# Altium PCB 2014_BALISE_CARTE_EMETTEUR.PCBDOC
Units mil, origin at the board's own origin, x right, y up, seen from the top; angles counter-clockwise.
Board outline 2362.2 x 2362.2 mil, 4 copper layers (1-TOP, 2-Signal, 3-GND, 4-BOT); 73 components, 81 nets, 316 pads, 119 vias.
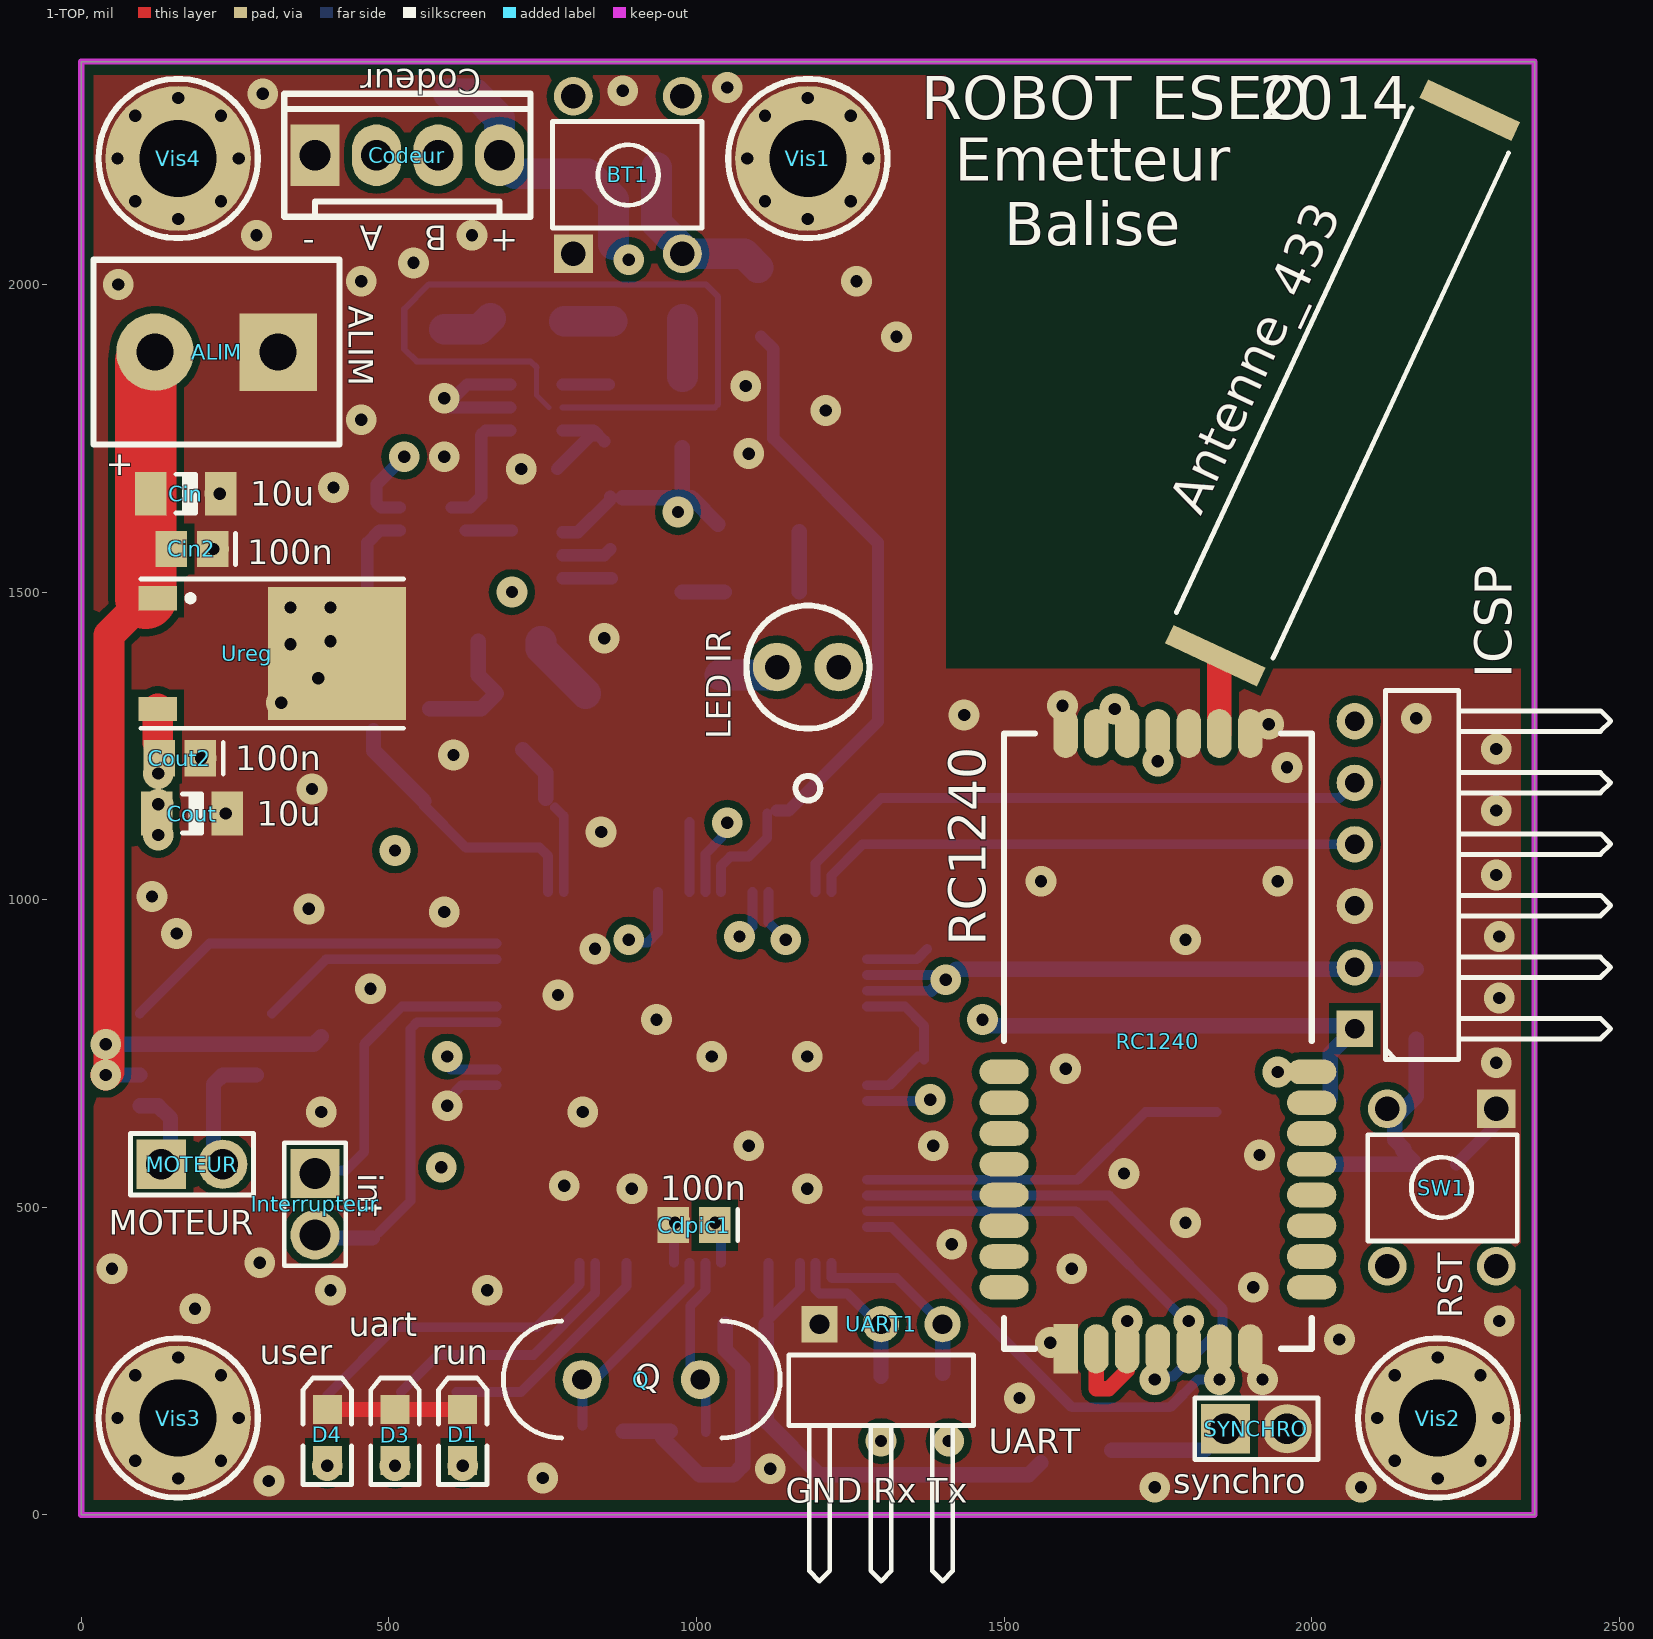
[diagram p0: 1-TOP view]
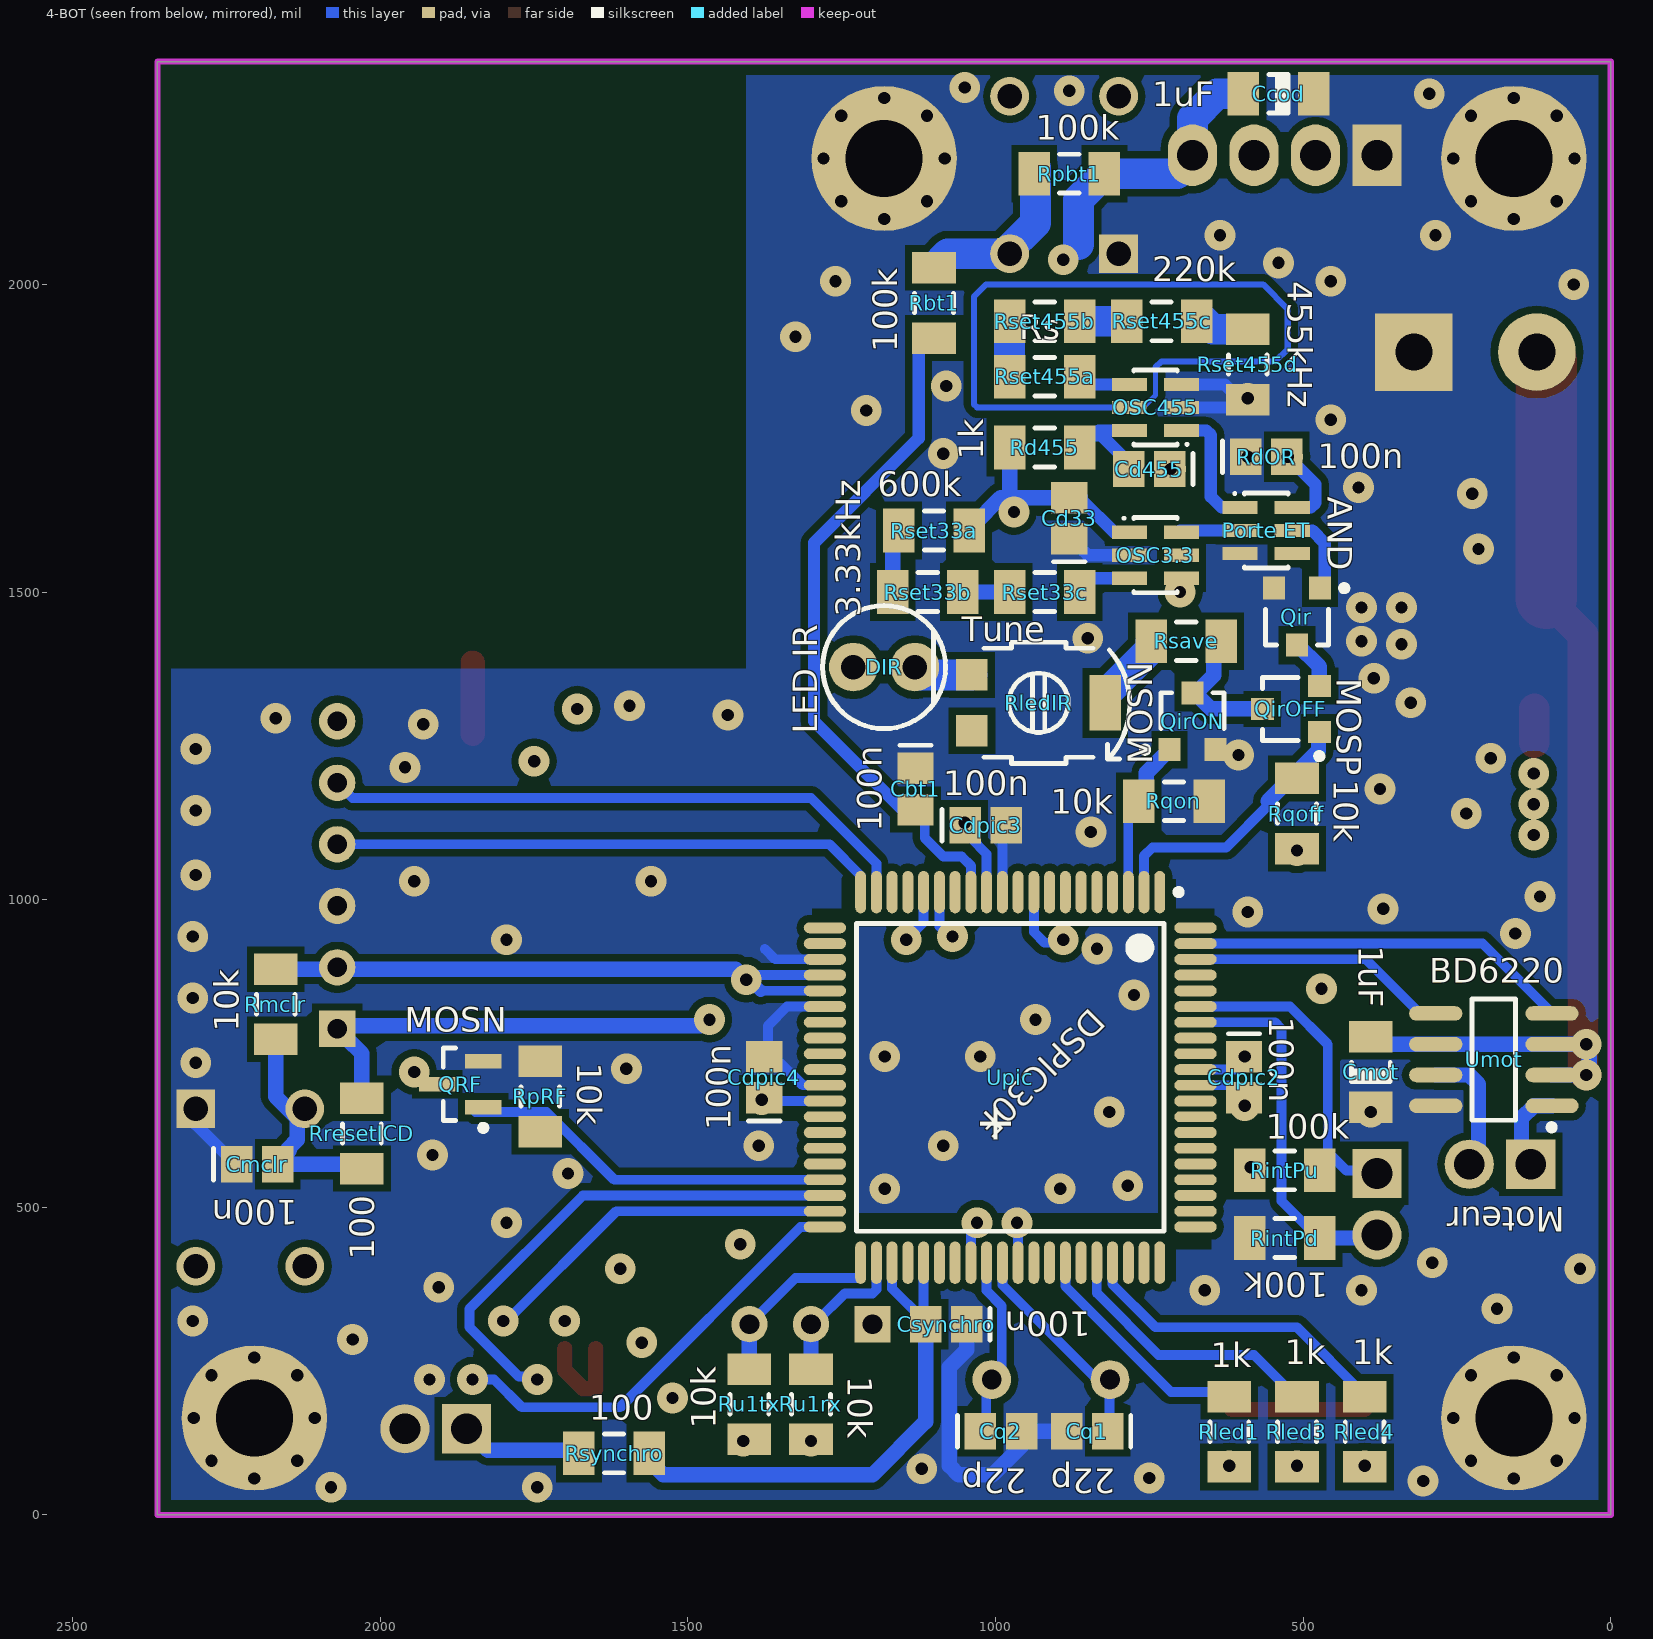
[diagram p1: 4-BOT view, seen from below]
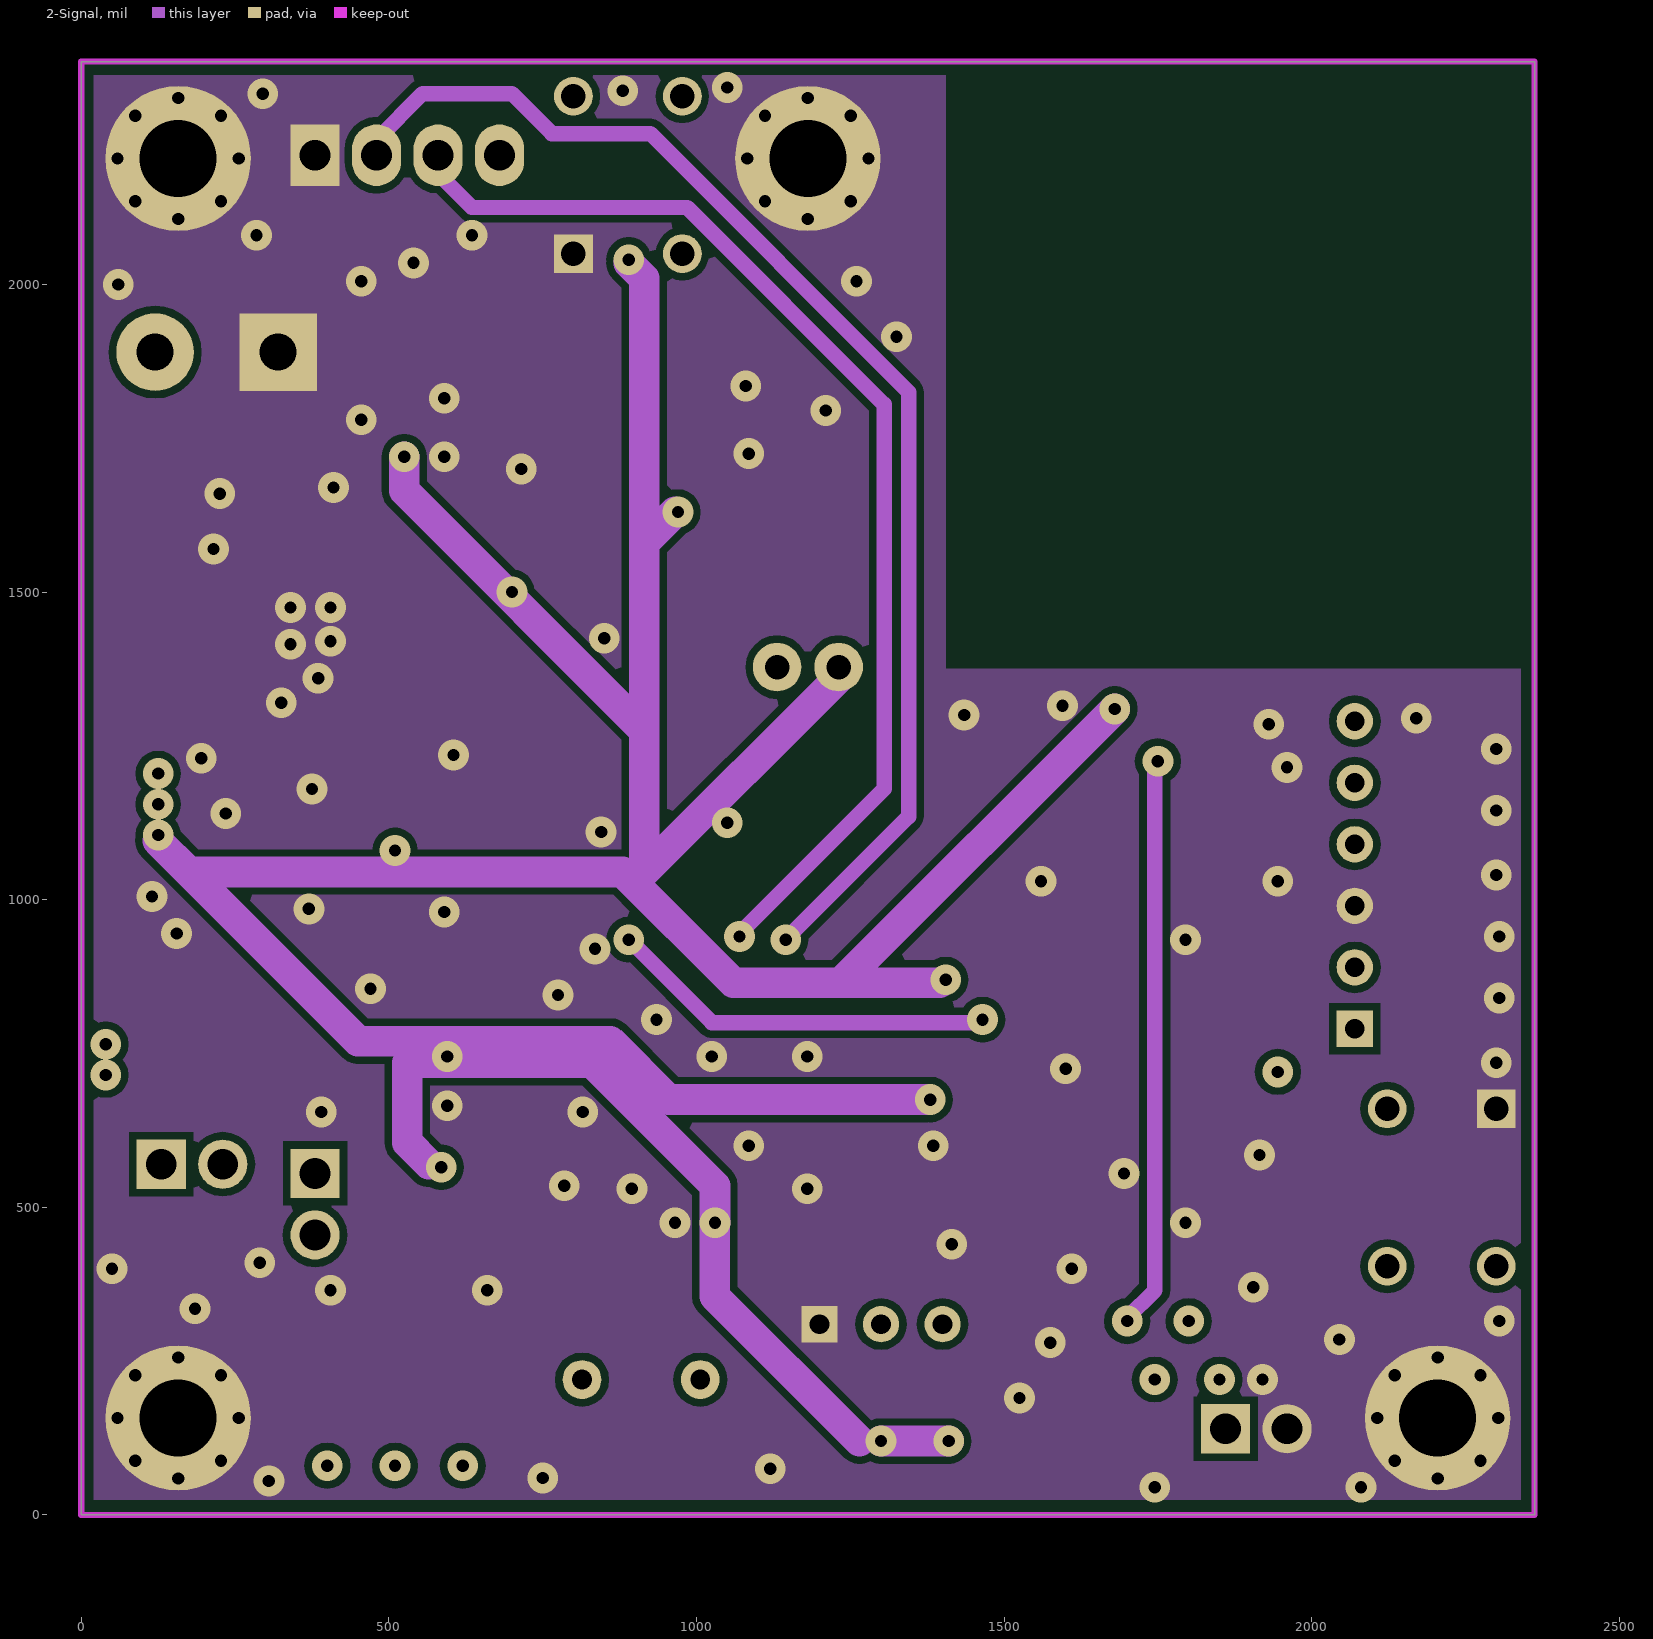
[diagram p2: 2-Signal]
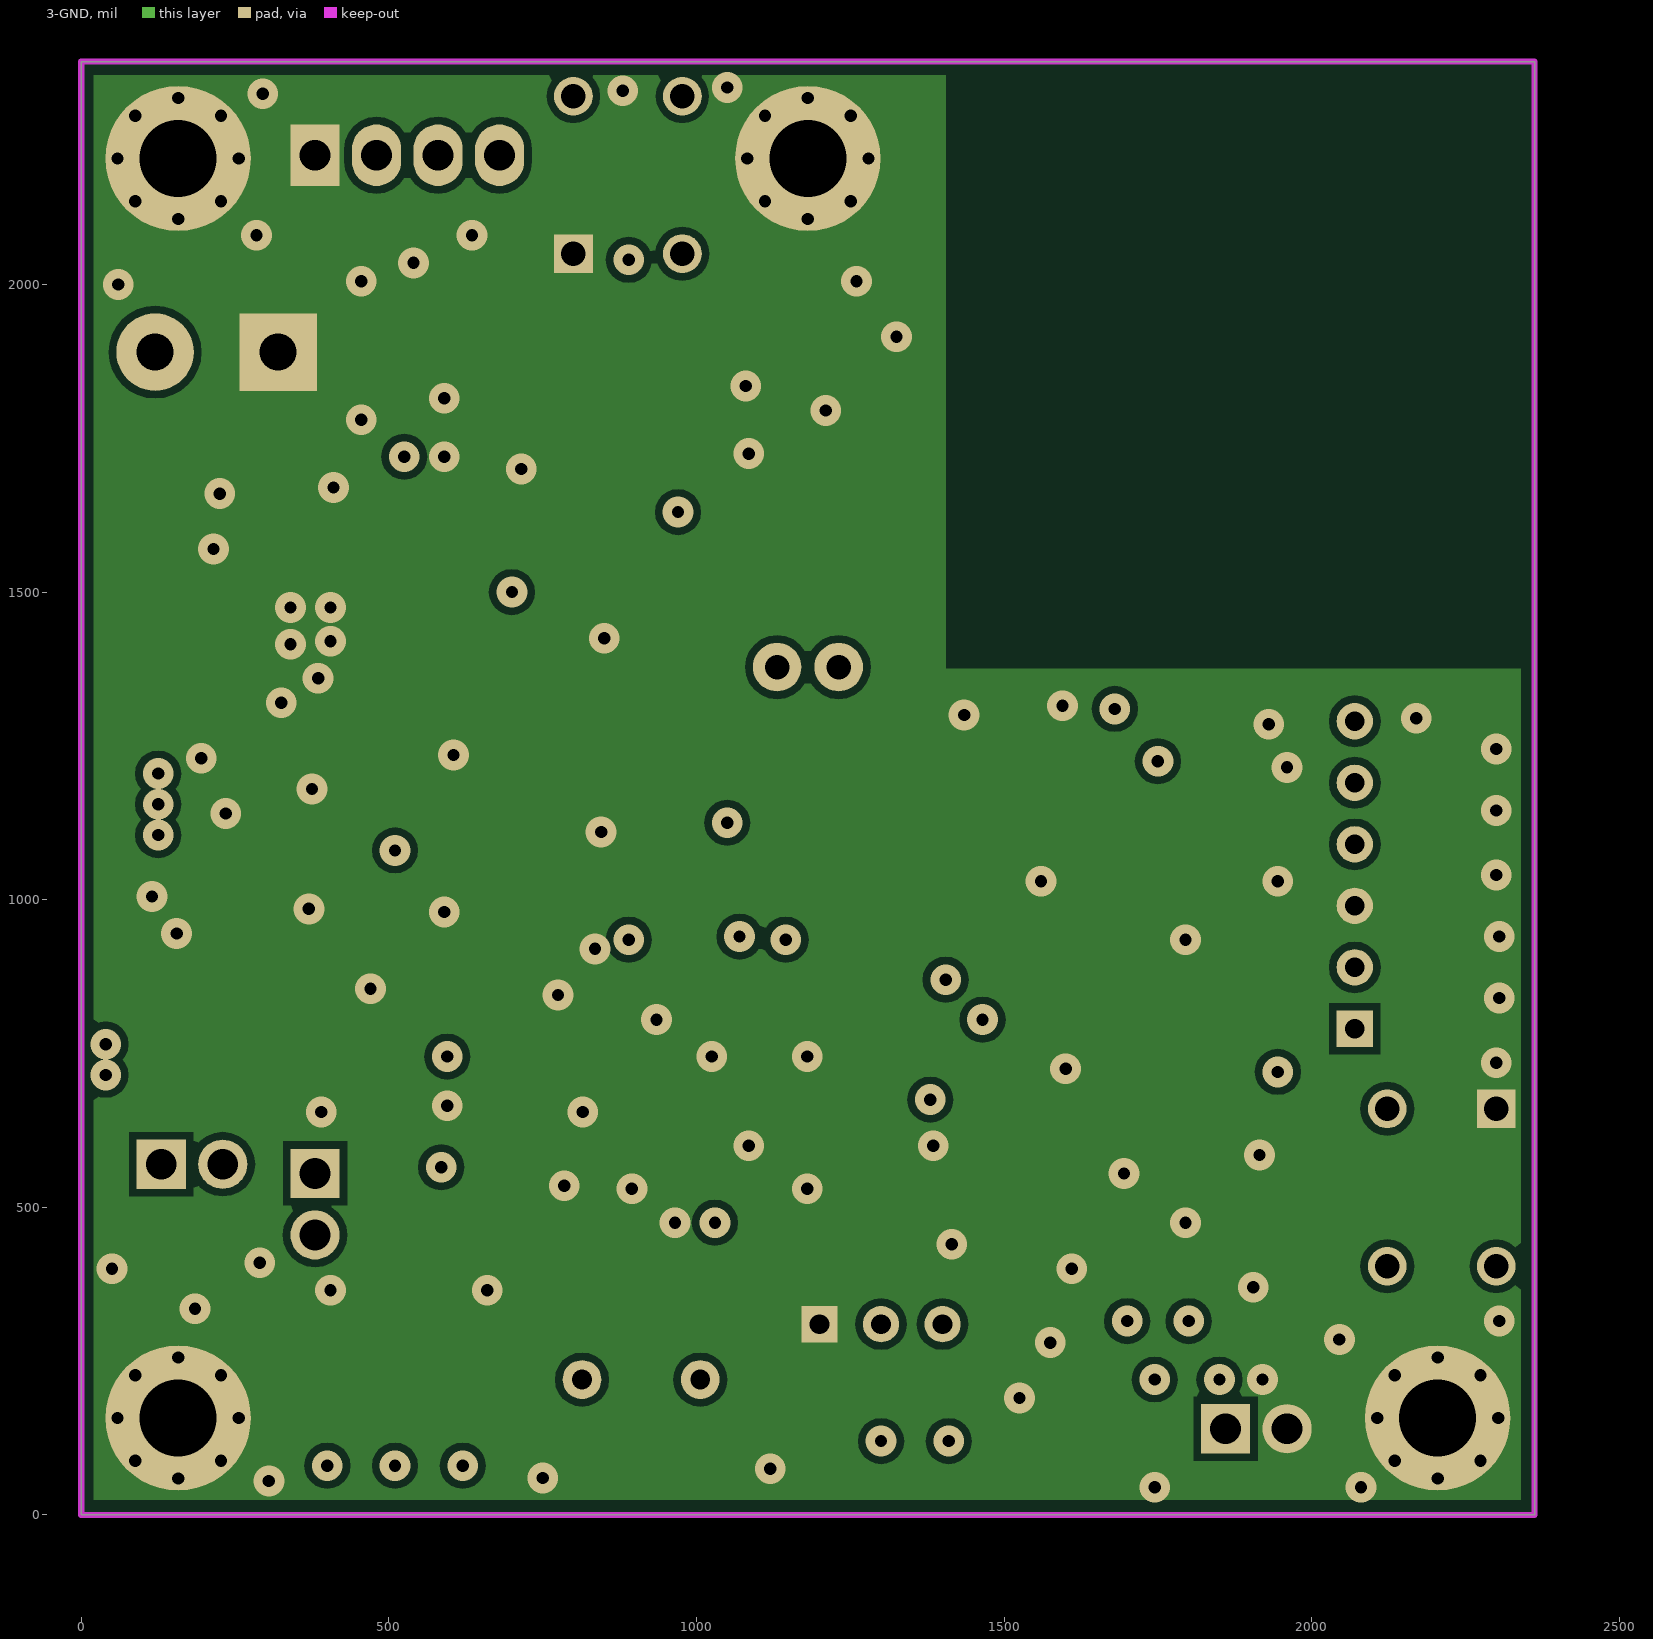
[diagram p3: 3-GND]
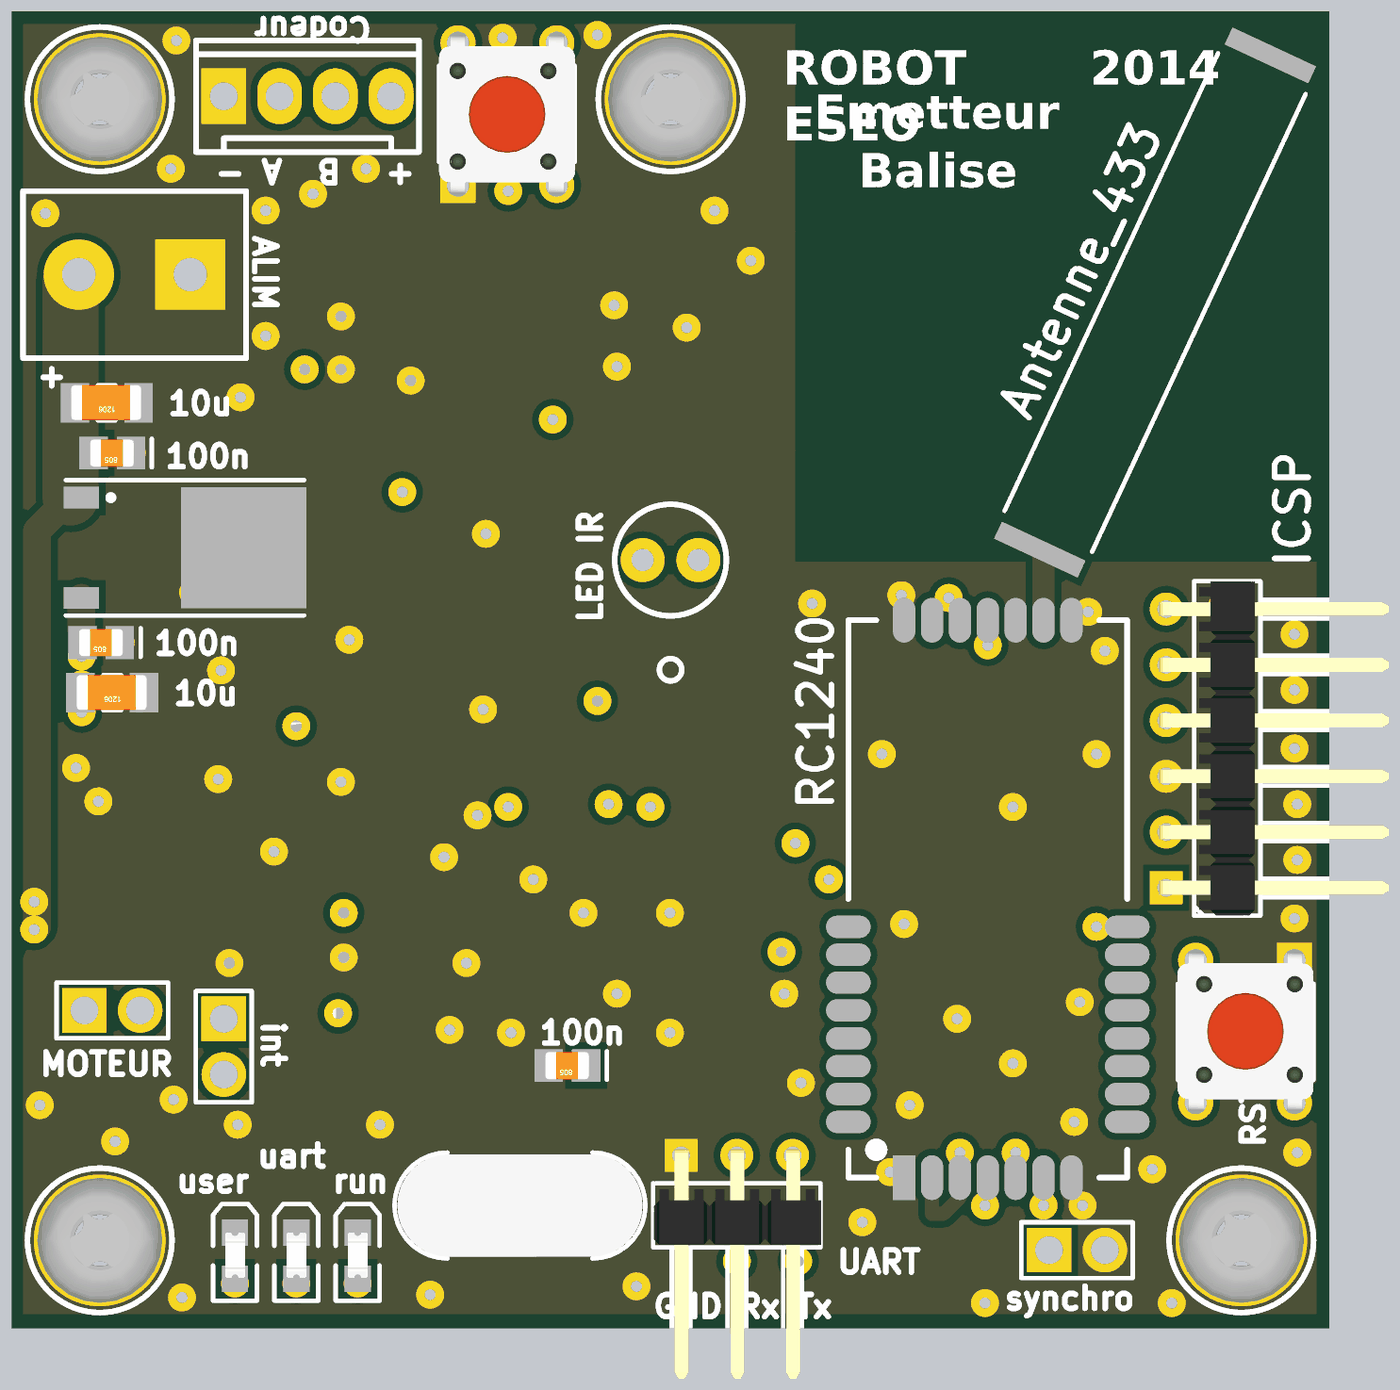
[diagram p4: 3D render of the assembled board from above, using the file's embedded part models]
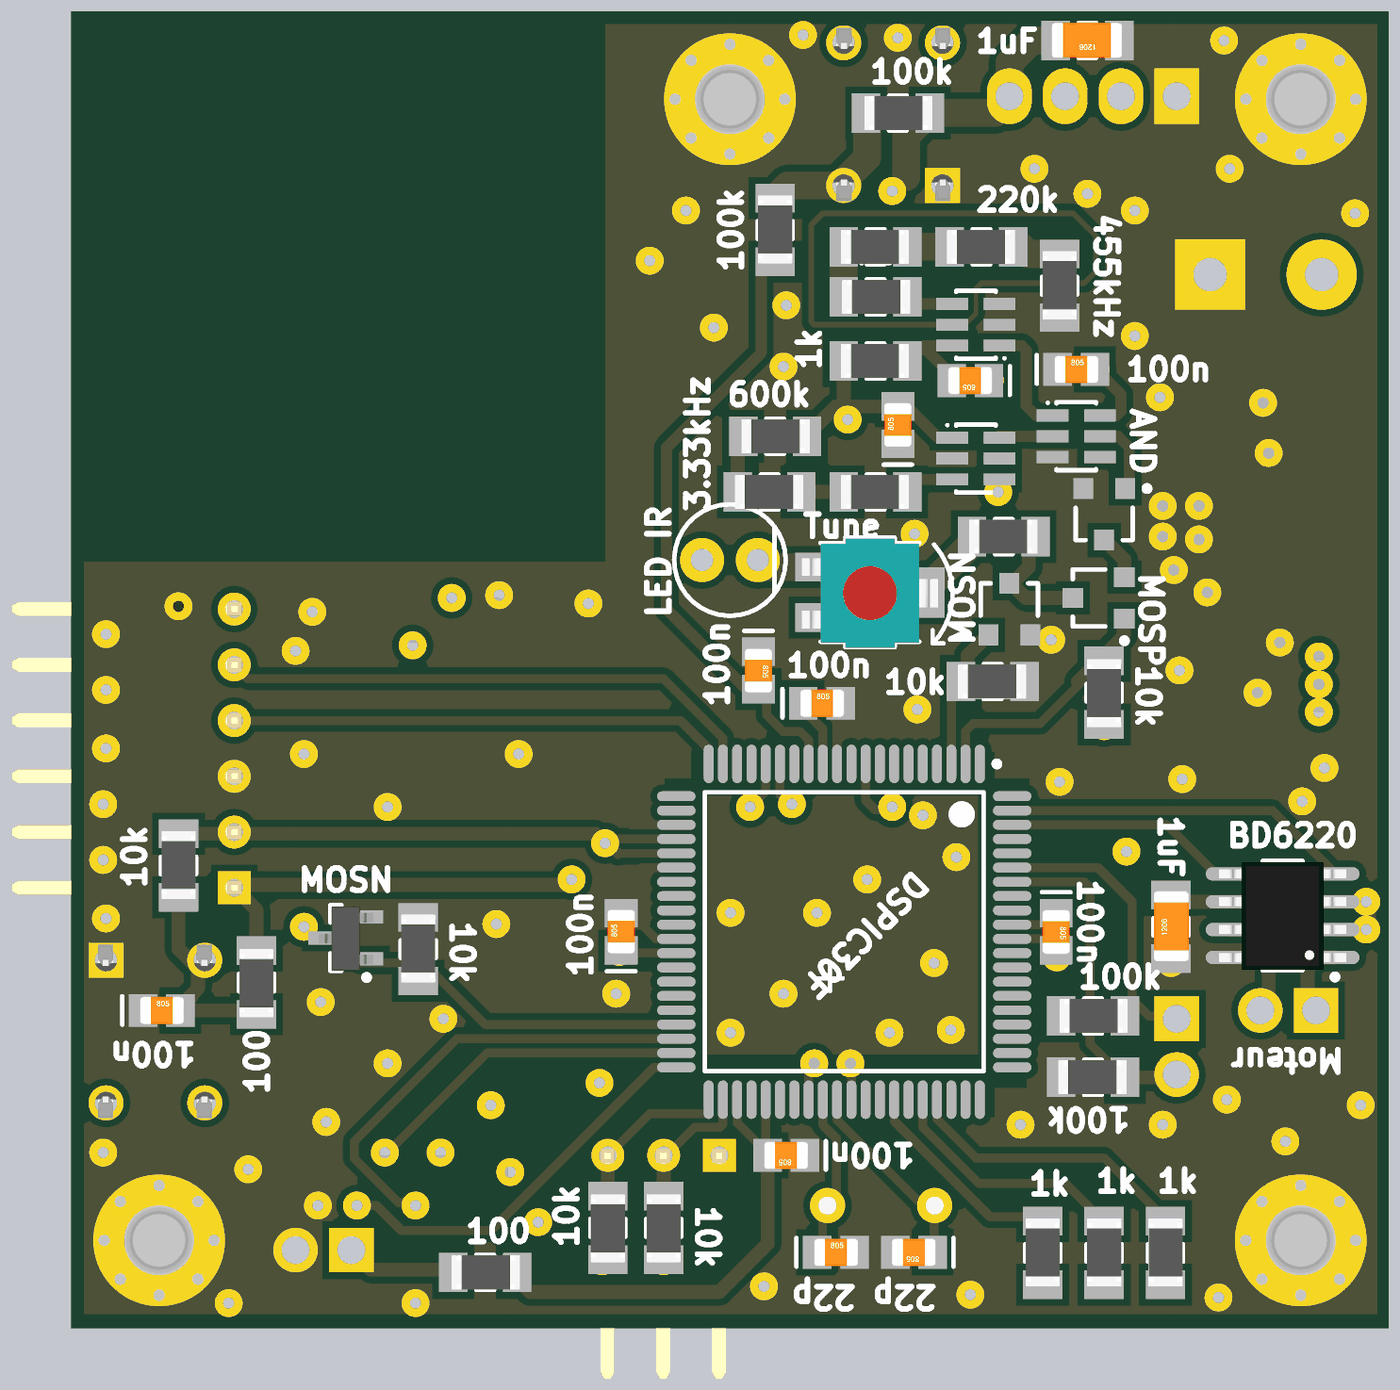
[diagram p5: 3D render of the assembled board from below, using the file's embedded part models]

## Layer stack, top to bottom
1-TOP: signal copper 1.4
Dielectric: core 12.6, FR-4, Dk 4.8
2-Signal: signal copper 1.4
Dielectric: prepreg 12.6, FR-4, Dk 4.8
3-GND: signal copper 1.4
Dielectric: core 12.6, FR-4, Dk 4.8
4-BOT: signal copper 1.4

## Board outline
0,0 0,2362.2 2362.2,2362.2 2362.2,0

## Design rules (kind name [scope] priority, off if disabled: settings)
Clearance Clearance_1 [InNamedPolygon('4-GND') Or  InNamedPolygon('3-GND') Or  InNamedPolygon('2-GND') Or  InNamedPolygon('1-GND')] p1: gap=12
Clearance [All] p2: gap=7
FabricationTestPointUsage TestPointUsage [All] p1: valid=0 allowmultiple=FALSE
FabricationTestpoint Testpoint [(IsPad And (OnTopLayer Or OnBottomLayer))] p1: side=3 testpointundercomponent=TRUE minsize=40 maxsize=100 preferedsize=60 minholesize=0 maxholesize=40 preferedholesize=32 testpointgrid=1 allowsidetop=TRUE allowsidebottom=TRUE usegrid=TRUE gridtolerance=0.01
HoleSize [All] p1: absolutevalues=TRUE maxlimit=200 minlimit=1 maxpercent=80.000 minpercent=20.000
PlaneConnect [All] p1: planeconnectstyle=Direct reliefexpansion=25 reliefentries=4 reliefconductorwidth=12 reliefairgap=15
PolygonConnect [All] p1: connectstyle=Direct reliefconductorwidth=10 reliefentries=4 polygonreliefangle="90 Angle"
RoomDefinition 2014_BALISE_CARTE_EMETTEUR [InComponentClass('2014_BALISE_CARTE_EMETTEUR')] p1: confinementstyle=ConfineIn formatcopy=TRUE lockcomponents=FALSE outline 2406.6,60 2726.6,60 2726.6,625 2406.6,625
RoutingLayers RoutingLayers_1 [All] p1: top layer_v5=TRUE mid layer 1_v5=FALSE mid layer 2_v5=FALSE bottom layer_v5=TRUE
RoutingLayers [All] p2: top layer_v5=TRUE mid layer 1_v5=FALSE mid layer 2_v5=FALSE bottom layer_v5=TRUE
RoutingVias [All] p1: holewidth=24 width=50 viastyle="Through Hole" minholewidth=24 minwidth=50 maxholewidth=24 maxwidth=50
SilkscreenOverComponentPads [All] p1: minsilkscreentomaskgap=10
SolderMaskExpansion [All] p1: expansion=0
Width ALIM [InNet('0') Or InNet('VDD')] p1: maxlimit=100 minlimit=10 preferedwidth=25
Width [All] p2: maxlimit=150 minlimit=5 preferedwidth=16
22 further rules are at their usual default settings.

## Components (designator, comment, footprint, x,y, rotation, side; value= is the part's Value field where it differs from the comment)
ALIM "ALIM" BORNIER2 320,1890 r180 top
Antenne_433 "433MHz" R1206_N#1 2050,1840 r65 top
BT1 "SW_Pushbutton_6x6mm_Vertical" "Switch 6x6 Vertical" 800,2050 r90 top
Cbt1 "100nF" C0805_N 1130,1180 r270 bottom
Ccod "1uF" C1206_N 540,2310 r0 bottom
Cd33 "100n" C0805_N 880,1620 r90 bottom
Cd455 "100n" C0805_N 750,1700 r0 bottom
Cdpic1 "100nF" C0805_N 996.1,471.1 r180 top
Cdpic2 "100nF" C0805_N 596.1,711.1 r270 bottom
Cdpic3 "100nF" C0805_N 1016.1,1121.1 r180 bottom
Cdpic4 "100nF" C0805_N 1376.1,711.1 r90 bottom
Cin "10uF" C1206_N 170,1660 r180 top
Cin2 "10nF" C0805_N 180,1570 r180 top
Cmclr "100nF" C0805_N 2200,570 r180 bottom
Cmot "1uF" C1206_N 390,720 r90 bottom
Codeur "BARRETTE4" HE14_4 380,2210 r0 top
Cout "10uF" C1206_N 180,1140 r180 top
Cout2 "100nF" C0805_N 160,1230 r180 top
Cq1 "22pF" C0805_N 851.1,136.1 r0 bottom
Cq2 "22pF" C0805_N 991.1,136.1 r180 bottom
Csynchro "1nF" C0805_N 1080,310 r0 bottom
D1 "LED" LED_0805 620,130 r90 top
D3 "LED" LED_0805 510,130 r90 top
D4 "LED" LED_0805 400,130 r90 top
DIR "LED" LED5 1131.1,1377.95 r90 bottom
ICSP "BARRETTE6" BARRETTE_6_M_C 2070,790 r90 top
Interrupteur "Interrupteur" HEADER2 380,555 r270 top
MOTEUR "MOTEUR" HEADER2 130,570 r0 top
OSC3.3 "LTC6900" SOT23-6 740,1560 r270 bottom
OSC455 "LTC6906" SOT23-6 740,1800 r90 bottom
"Porte ET" "FAR 1697256 (SOT23-5 !)" SOT23-6 560,1600 r270 bottom
Q "QU" HC49US 910,220 r180 top
Qir "IRLML2803" SOT-23 510,1460 r0 bottom
QirOFF "IRLML2803" SOT-23 520,1310 r90 bottom
QirON "IRLML2803" SOT-23 680,1290 r180 bottom
QRF "Transistor MOSFET-N" SOT23-3N 1870,700 r0 bottom
Rbt1 "100k" R1206_N#2 1100,1970 r90 bottom
RC1240 "RC1240-Radiocraft" RC1240 1600,270 r90 top
Rd455 "1K" R1206_N#2 920,1735 r0 bottom
RdOR "100n" C0805_N 560,1720 r180 bottom
RintPd "100k" R1206_N#2 530,450 r0 bottom
RintPu "100k" R1206_N#2 530,560 r180 bottom
Rled1 "1K" R1206_N#2 620,135 r90 bottom
Rled3 "1K" R1206_N#2 510,135 r90 bottom
Rled4 "1K" R1206_N#2 400,135 r90 bottom
RledIR "100" Trimmer_Bourns_3314G 930,1320 r270 bottom
Rmclr "10k" R1206_N#2 2170,830 r90 bottom
Rpbt1 "100k" R1206_N#2 880,2180 r180 bottom
RpRF "10k" R1206_N#2 1740,680 r90 bottom
Rqoff "10k" R1206_N#2 510,1140 r270 bottom
Rqon "10k" R1206_N#2 710,1160 r0 bottom
RresetICD "100" R1206_N#2 2030,620 r270 bottom
Rsave "100" R1206_N#2 690,1420 r0 bottom
Rset33a "0K" R1206_N#2 1100,1600 r180 bottom
Rset33b "0K" R1206_N#2 1110,1500 r0 bottom
Rset33c "600K" R1206_N#2 920,1500 r0 bottom
Rset455a "220K" R1206_N#2 920,1850 r180 bottom
Rset455b "0K" R1206_N#2 920,1940 r0 bottom
Rset455c "0K" R1206_N#2 730,1940 r0 bottom
Rset455d "0K" R1206_N#2 590,1870 r90 bottom
Rsynchro "100" R1206_N#2 1620,100 r180 bottom
Ru1rx "10k" R1206_N#2 1300,180 r270 bottom
Ru1tx "10k" R1206_N#2 1400,180 r270 bottom
SW1 "SW_Pushbutton_6x6mm_Vertical" "Switch 6x6 Vertical" 2300,660 r270 top
SYNCHRO "SYNCHRO" HEADER2 1860,140 r0 top
UART1 "BARRETTE3" BARRETTE_3_M_C 1200,310 r0 top
Umot "BD6220F" SO8_N 190,740 r0 bottom
Upic "dsPIC30F6010A" TQFP80_N 976.1,711.1 r270 bottom
Ureg "MC7805BDTG" 369A-13 270,1400 r270 top
Vis1 "Pad_M3" M3x6mm 1181.1,2204.72 r0 top
Vis2 "Pad_M3" M3x6mm 2204.72,157.48 r0 top
Vis3 "Pad_M3" M3x6mm 157.48,157.48 r0 top
Vis4 "Pad_M3" M3x6mm 157.48,2204.72 r0 top

## Footprints (in the part's own frame and the unit in brackets; to place one, negate y for a bottom-side part, rotate by r counter-clockwise, add the part's x,y. Pads: shape width x height; smd on the part's side, far side on the other; paste and mask are expansions set on the pad)
369A-13 [mm] "D-PAK/TO-252-AA; 3 Leads (1 Cropped); Body 10.3 (inc. leads) x 6.7 mm (LxW max)"
  rect 1x1.6 smd: 1(-2.285,-3.7) 3(2.285,-3.7)
  rect 5.5x5.7 smd: 4(0,3.7)
  silkscreen extent -3.09,-4.4 3.09,6.45
BARRETTE_3_M_C [mm] "BARRETTE 3 CONTACTS ; 1 RANGEE ; COUDEE ; MALE ; ESPACEMENT BROCHES = 2.54 mm"
  rect 1.5x1.5 hole 0.813: 1(0,0)
  round 1.5 hole 0.813: 2(2.54,0) 3(5.08,0)
  silkscreen extent -1.27,-10.61 6.35,-1.27, body extent -1.25,-10.18 6.37,0.3, height 3.18
BARRETTE_6_M_C [mm] "BARRETTE 6 CONTACTS ; 1 RANGEE ; COUDEE ; MALE ; ESPACEMENT BROCHES = 2.54 mm"
  rect 1.5x1.5 hole 0.813: 1(0,0)
  round 1.5 hole 0.813: 2(2.54,0) 3(5.08,0) 4(7.62,0) 5(10.16,0) 6(12.7,0)
  silkscreen extent -1.27,-10.57 13.97,-1.27, body extent -1.27,-10.14 13.97,0.34, height 3.18
BORNIER2 [mm] "Connector; Header; 2 Position; screw terminal blocks, Pin Spacing=5.08mm"
  rect 3.2x3.2 hole 1.524: 1(0,0)
  round 3.2 hole 1.524: 2(5.08,0)
  silkscreen extent -2.54,-3.81 7.62,3.81
C0805_N [mm] "Chip Capacitor, Body 2.0x1.3mm, IPC Medium Density"
  rect 1.3x1.5 smd: 1(-0.85,0) 2(0.85,0)
  silkscreen extent -1.8,-0.65 -1.8,0.65, body extent -0.99,-0.63 1.01,0.63, height 0.8
C1206_N [mm] "Chip Capacitor, Body 3.2x1.6mm, IPC Medium Density"
  rect 1.3x1.8 smd: 1(-1.45,0) 2(1.45,0)
  silkscreen extent -0.4,-0.8 0.4,0.8, body extent -1.57,-0.81 1.63,0.79, height 1.02
HC49US [mil] "Quartz Crystal, HC49 Bas profil, Pas 4,88mm"
  round 63 hole 32: 1(-96.06,0) 2(96.06,0)
  silkscreen extent -226,-95 224,95, body extent -221,-92 219,92, height 143
HE14_4 [mil] "Connector; HE14; 4 Position; Pin Spacing=2.54mm"
  rect 80x100 hole 50: 1(0,0)
  oval 80x100 hole 50: 2(100,0) 3(200,0) 4(300,0)
  silkscreen extent -50,-100 350,100
HEADER2 [mil] "Connector; Header; 2 Position"
  rect 80x80 hole 50: 1(0,0)
  round 80 hole 50: 2(100,0)
  silkscreen extent -50,-50 150,50
LED5 [mil] "LED; 5mm; Pin Spacing=2.54mm"
  round 79 hole 40: 1(0,100) 2(0,0)
  silkscreen extent -100,-50 100,150
LED_0805 [mm] "SM LED; 2 Flat Leads"
  rect 1.2x1.2 smd: 1(-1.05,0) 2(1.05,0)
  silkscreen extent -2.05,-1 2.35,1, body extent -1.05,-0.64 1.06,0.64, height 1.2
M3x6mm [mm] "Vis M3 X 6mm _TORX_Tête 6mm"
  round 0.8 hole 0.508: 1(-2.5,0) 1(-1.768,-1.768) 1(-1.768,1.768) 1(0,-2.5) 1(0,2.5) 1(1.768,-1.768) 1(1.768,1.768) 1(2.5,0)
  round 6 hole 3.175: 1(0,0)
  silkscreen extent -3.29,-3.28 3.29,3.28, body extent -2.84,-2.85 2.86,2.85, height 1.67
R1206_N#1 [mm] "Chip Resistor, Body 3.2x1.6mm, IPC Medium Density"
  rect 0.85x4.2 smd: 1(-12.425,0) 2(12.425,0)
  silkscreen extent -11.5,-2.2 11.5,2.2, body extent -12.85,-2.11 12.85,2.08, height 0.71
R1206_N#2 [mm] "Chip Resistor, Body 3.2x1.6mm, IPC Medium Density"
  rect 1.3x1.8 smd: 1(-1.45,0) 2(1.45,0)
  silkscreen extent -0.4,-0.8 0.4,0.8, body extent -1.68,-0.87 1.68,0.87, height 0.71
RC1240 [mil]
  round 40 on Top Overlay: 0(50,50)
  rect 80x40 smd: 1(0,0)
  oval 80x40 smd: 2(0,-50) 3(0,-100) 4(0,-150) 5(0,-200) 6(0,-250) 7(0,-300) 8(1000,-300) 9(1000,-250) 10(1000,-200) 11(1000,-150) 12(1000,-100) 13(1000,-50) 14(1000,0)
  oval 40x80 smd: 15(100,-400) 16(150,-400) 17(200,-400) 18(250,-400) 19(300,-400) 20(350,-400) 21(400,-400) 22(450,-400) 23(450,100) 24(400,100) 25(350,100) 26(300,100) 27(250,100) 28(200,100) 29(150,100) 30(100,100)
  silkscreen extent 0,-400 1000,100
SO8_N [mm] "8-Pin Small Outline Integrated Circuit 1.27 mm Pitch, IPC Medium Density"
  oval 2.2x0.6 smd: 1(-2.4,1.905) 2(-2.4,0.635) 3(-2.4,-0.635) 4(-2.4,-1.905) 5(2.4,-1.905) 6(2.4,-0.635) 7(2.4,0.635) 8(2.4,1.905)
  silkscreen extent -2.51,-2.5 0.9,2.92, body extent -2.89,-2.45 2.89,2.46, height 1.75
SOT23-3N [mm] "SOT23, 3-Leads, Body 2.9x1.3mm, Pitch 0.95mm, Lead Span 2.5mm, IPC Medium Density"
  rect 1.5x0.6 smd: 1(-0.95,0.95) 2(-0.95,-0.95) 3(0.95,0)
  silkscreen extent -1.07,-1.5 0.7,1.92, body extent -1.24,-1.5 1.23,1.5, height 1.1
SOT23-6 [mm] "SOT-23/SC-74A; 5 Leads; Body 3.1 x 3 mm, inc. leads (LxW max)"
  rect 0.55x1.45 smd: 1(-0.95,-1.075) 2(0,-1.075) 3(0.95,-1.075) 4(0.95,1.075) 5(0,1.075) 6(-0.95,1.075)
  silkscreen extent -1.57,-1.35 1.55,0.9
SOT-23 [mm] "SOT-23; 3 Leads; Body 3.1 x 2.5 mm, inc. leads (LxW max)"
  rect 0.9x0.95 smd: 1(-0.95,-1.175) 2(0.95,-1.175) 3(0,1.175)
  silkscreen extent -2.07,-1.3 1.3,1.18
"Switch 6x6 Vertical" [mm]
  rect 1.6x1.6 hole 1.016: 1(0,0)
  round 1.6 hole 1.016: 2(6.5,0) 3(0,-4.5) 4(6.5,-4.5)
  silkscreen extent 1.07,-5.31 5.46,0.86, body extent -0.71,-5.34 7.19,0.86, height 7
TQFP80_N [mm] "80-Pin Thin Plastic Quad Flat Pack 0.65 mm Pitch, IPC Medium Density"
  oval 1.75x0.45 smd: 1(-7.65,6.175) 2(-7.65,5.525) 3(-7.65,4.875) 4(-7.65,4.225) 5(-7.65,3.575) 6(-7.65,2.925) 7(-7.65,2.275) 8(-7.65,1.625) 9(-7.65,0.975) 10(-7.65,0.325) 11(-7.65,-0.325) 12(-7.65,-0.975) 13(-7.65,-1.625) 14(-7.65,-2.275) 15(-7.65,-2.925) 16(-7.65,-3.575) 17(-7.65,-4.225) 18(-7.65,-4.875) 19(-7.65,-5.525) 20(-7.65,-6.175) 41(7.65,-6.175) 42(7.65,-5.525) 43(7.65,-4.875) 44(7.65,-4.225) 45(7.65,-3.575) 46(7.65,-2.925) 47(7.65,-2.275) 48(7.65,-1.625) 49(7.65,-0.975) 50(7.65,-0.325) 51(7.65,0.325) 52(7.65,0.975) 53(7.65,1.625) 54(7.65,2.275) 55(7.65,2.925) 56(7.65,3.575) 57(7.65,4.225) 58(7.65,4.875) 59(7.65,5.525) 60(7.65,6.175)
  oval 0.45x1.75 smd: 21(-6.175,-7.65) 22(-5.525,-7.65) 23(-4.875,-7.65) 24(-4.225,-7.65) 25(-3.575,-7.65) 26(-2.925,-7.65) 27(-2.275,-7.65) 28(-1.625,-7.65) 29(-0.975,-7.65) 30(-0.325,-7.65) 31(0.325,-7.65) 32(0.975,-7.65) 33(1.625,-7.65) 34(2.275,-7.65) 35(2.925,-7.65) 36(3.575,-7.65) 37(4.225,-7.65) 38(4.875,-7.65) 39(5.525,-7.65) 40(6.175,-7.65) 61(6.175,7.65) 62(5.525,7.65) 63(4.875,7.65) 64(4.225,7.65) 65(3.575,7.65) 66(2.925,7.65) 67(2.275,7.65) 68(1.625,7.65) 69(0.975,7.65) 70(0.325,7.65) 71(-0.325,7.65) 72(-0.975,7.65) 73(-1.625,7.65) 74(-2.275,7.65) 75(-2.925,7.65) 76(-3.575,7.65) 77(-4.225,7.65) 78(-4.875,7.65) 79(-5.525,7.65) 80(-6.175,7.65)
  silkscreen extent -7.77,-6.35 6.35,7.07, body extent -7,-7 7,7, height 1.6
Trimmer_Bourns_3314G [mm] "Trimmer monotour, Bourns,serie 3314P"
  rect 1.3x1.3 smd: 1(-1.15,-2.75) 3(1.15,-2.75)
  rect 2.3x1.3 smd: 2(0,2.75)
  silkscreen extent -2.5,-2.25 2.5,3.76, body extent -2.46,-3.1 2.54,3.1, height 2.55

## Part data
ALIM: library part BORNIER2
Antenne_433: library part Resistor, "CAN4311129200431K"
BT1 SW1: "Switch tactil 6mm x 6mm Vertical"
Cbt1 Cdpic1 Cdpic2 Cdpic3 Cdpic4 Cin Cin2 Cmclr Cout Cout2 Cq1 Cq2 Csynchro: library part Capacitor, "Capacitor"
Ccod Cd33 Cd455 Cmot RdOR: library part Condensateur, "Capacitor"
Codeur: "Header, 4-Pin"
D1 D3 D4: "Typical LED"
DIR: "Typical RED, GREEN, YELLOW, AMBER GaAs LED"
ICSP: "Header, 6-Pin"
Interrupteur MOTEUR SYNCHRO: library part BARRETTE2, "Header, 2-Pin"
OSC3.3 OSC455 "Porte ET": library part SOT23-6, "Header, 3-Pin, Dual row"
Q: library part QUARTZ_DROIT_BAS_PROFIL, "Crystal Oscillator"
Qir QirOFF QirON: "HEXFET Power MOSFET"
QRF: "N-Channel MOSFET"
Rbt1 Rd455 RintPd RintPu Rled1 Rled3 Rled4 Rmclr Rpbt1 RpRF Rqoff Rqon RresetICD Rsave Rset33a Rset33b Rset33c Rset455a Rset455b Rset455c Rset455d Rsynchro Ru1rx Ru1tx: library part Resistor, "Resistor"
RC1240: "RC1240 - Radiocraft 433MHz Transceiver"
RledIR: library part "Trimmer monotour, Bourns,serie 3314P", "Trimmer monotour, Bourns,serie 3314P"
UART1: "Header, 3-Pin"
Umot: "H Bridge - 2A"
Upic: "High-Performance, 16-bit Digital Signal Controllers"
Ureg: library part MC7805ACD2T, "Three-Terminal Positive Voltage Regulator"
Vis1 Vis2 Vis3 Vis4: library part "Vis M3 X 6mm _TORX_Tête 6mm", "Vis M3 X 6mm _TORX_Tête 6mm"

## Via types
v1: diameter 50, hole 20, 1-TOP to 4-BOT, 119 vias

## Nets (pads, with @x,y where several pads share a name; then routed paths per layer and width w, separated by ;. In a path a pad name is that pad's centre, name@x,y a point inside that pad or via, vN(x,y) a via of type N, cw(c..) or ccw(c..) an arc to the next point about the centre after c; other vN are vias at no path point)
ANTENNA: Antenne_433.1 RC1240.9 | length 115
  1-TOP w40: RC1240.9 Antenne_433.1@1850,1385
BT1: BT1.3 Rbt1.2 Rpbt1.1 | length 285.2
  4-BOT w50: Rpbt1.1@935,2190 935,2100 985,2050 1077.09,2050 Rbt1.2
C1RX: Upic.72
C1TX: Upic.73
GND: "Porte ET.3" ALIM.1 BT1.1 Cbt1.1 Ccod.1 Cd33.1 Cd455.1 Cdpic1.2 Cdpic2.2 Cdpic3.2 Cdpic4.2 Cin2.1 Cin.1 Cmclr.1 Cmot.1 Codeur.1 Cout2.1 Cout.1 Cq1.2 Cq2.2 Csynchro.1 D1.2 D3.2 D4.2 ICSP.3 OSC3.3.2 OSC455.2 OSC455.3 Qir.2 QirON.2 QRF.2 RC1240.1 RC1240.7 RC1240.8 RC1240.10 RC1240.14 RdOR.1 RintPd.2 RpRF.2 Rqon.1 Rset455d.1 SW1.1 SYNCHRO.2 UART1.1 Umot.8 Upic.11 Upic.23 Upic.26 Upic.31 Upic.51 Upic.70 Ureg.4 Vis1.1 Vis2.1 Vis3.1 Vis4.1 | length 1719.2
  1-TOP w25: D4.2 D3.2 D1.2@616.34,171.34
  4-BOT w16: Cdpic2.2@600,680 618.31,698.31 Upic.70 ; Upic.51 v1@963.31,478.31 ; Upic.11 Cdpic3.2@988.9,1126.1 ; Upic.31 1313.31,698.31 Cdpic4.2@1360,745 ; Upic.26 1338.74,826.26 1370,795 Cdpic4.2@1370,740 ; Upic.23 1358.03,903.03 1375,920
  4-BOT w20: Rset455d.1@600,1800 OSC455.2 ; Rset455d.1@610,1820 627.4,1837.4 OSC455.3 ; OSC3.3.2 850,1560 Cd33.1@860,1570 ; Cmclr.1@2235,570 2300,635 SW1.1
  4-BOT w25: Cq1.2@881.1,136.1 Cq1.2 Cq2.2 ; Cq2.2@945,125 1005,65 1060,65 1075,80 1075,240 1046.54,268.46 Csynchro.1
  other v1: 1745,45 2080,45 305,55 750,60 1120,75 1525,190 1920,220 1575,280 2045,285 2305,315 185,335 405,365 660,365 1905,370 50,400 1610,400 290,410 1415,440 965,475 1795,475 895,530 1180,530 785,535 1695,555 1915,585 1085,600 1385,600 390,655 815,655 595,665 1600,725 2300,735 1025,745 1180,745 935,805 2305,840 775,845 470,855 835,920 1795,935 2305,940 155,945 590,980 370,985 115,1005 1560,1030 1945,1030 2300,1040 845,1110 235,1140 2300,1145 375,1180 1960,1215 195,1230 605,1235 2300,1245 1930,1285 2170,1295 1435,1300 1595,1315 325,1320 385,1360 340,1415 405,1420 850,1425 340,1475 405,1475 215,1570 225,1660 410,1670 715,1700 590,1720 1085,1725 455,1780 1210,1795 590,1815 1080,1835 1325,1915 60,2000 455,2005 1260,2005 540,2035 285,2080 635,2080 295,2310 880,2315 1050,2320
GUARDRING: OSC455.5 | length 1330.3
  4-BOT w8: 740,1865 740,1820 OSC455.5@760,1800
  4-BOT w10: 740,1865 730,1875 545,1875 525,1895 525,1960 565,2000 1015,2000 1035,1980 1035,1805 1030,1800 OSC455.5
LED1: Rled1.2 Upic.54 | length 386
  4-BOT w16: Rled1.2@610,200 715,200 886.54,371.54 Upic.54
LED2: Upic.55
LED3: Rled3.2 Upic.56 | length 431.3
  4-BOT w16: Rled3.2@520,200 580,260 735,260 835.35,360.35 Upic.56
LED4: Rled4.2 Upic.57 | length 519.4
  4-BOT w16: Rled4.2@400,195 510,305 740,305 809.76,374.76 Upic.57
LED5: Upic.64
LED6: Upic.65
MCLR: ICSP.1 RresetICD.1 Upic.9 | length 1506.2
  2-Signal w25: v1(890,935) 1025,800 v1@1470,800
  4-BOT w16: v1@900,930 920.43,930 937.72,947.28 Upic.9
  4-BOT w25: v1@1480,795 2065,795 ICSP.1 ; RresetICD.1 2030,750 ICSP.1 ; ICSP.1@2042.5,762.5 ICSP.1
  other v1: 1465,805
NetCd455_2: Cd455.2 OSC455.6 Rd455.1 | length 159.3
  4-BOT w20: Cd455.2@773.46,1700 828.46,1755 835,1755 ; OSC455.6 832.4,1762.6 Rd455.1@850,1745
NetCmclr_2: Cmclr.2 Rmclr.1 RresetICD.2 SW1.3 | length 350.4
  4-BOT w25: RresetICD.2@2040,570 2160,570 2165,575 Cmclr.2@2147.5,592.5 ; Cmclr.2@2150,595 2135,610 2135,645 2170,680 Rmclr.1
NetCq1_1: Cq1.1 Q.2 Upic.50 | length 337
  4-BOT w16: Cq1.1@815,145 815,200 988.9,373.9 Upic.50
NetCq2_1: Cq2.1 Q.1 Upic.49 | length 295.4
  4-BOT w16: Upic.49 1014.49,364.49 990,340 990,225 1015,200 Cq2.1@1015,135
NetCsynchro_2: Csynchro.2 Rsynchro.2 Upic.43 Upic.45 | length 855.7
  4-BOT w16: Csynchro.2@1116.85,313.15 Upic.45 ; Csynchro.2@1120,320 1168.03,368.03 Upic.43
  4-BOT w25: Csynchro.2 1113.46,151.54 1200,65 1540,65 Rsynchro.2@1560,85
NetD1_1: D1.1 Rled1.1
  other v1: 620,80
NetD3_1: D3.1 Rled3.1
  other v1: 510,80
NetD4_1: D4.1 Rled4.1
  other v1: 400,80
NetDIR_2: DIR.2 RledIR.1 | length 92
  4-BOT w50: RledIR.1 DIR.2@1130.28,1365.28
NetInterrupteur_1: Interrupteur.1 RintPu.2 Upic.75 | length 497.7
  4-BOT w16: Interrupteur.1@390,560 430,560 460,590 460,765 521.26,826.26 Upic.75
NetInterrupteur_2: Interrupteur.2 RintPd.1 Upic.74 | length 588
  4-BOT w16: RintPd.1@485,460 535,510 535,790 545.67,800.67 Upic.74
  4-BOT w25: Interrupteur.2@380,450 RintPd.1
NetMOTEUR_1: MOTEUR.1 Umot.1 | length 132.8
  4-BOT w25: Umot.1 125,665 145,645 MOTEUR.1@145,570
NetMOTEUR_2: MOTEUR.2 Umot.7 | length 200.7
  4-BOT w25: MOTEUR.2@215,575 215,700 230,715 Umot.7
NetOSC3.3_3: OSC3.3.3 Rset33c.1 | length 80.1
  4-BOT w20: OSC3.3.3 Rset33c.1@862.4,1522.6
NetOSC3.3_6: "Porte ET.2" OSC3.3.6 | length 75.1
  4-BOT w20: 625,1600 OSC3.3.6@700.08,1600
NetOSC455_1: "Porte ET.1" OSC455.1 | length 205.8
  4-BOT w20: 602.32,1637.4 632.4,1637.4 650,1655 650,1755 657.6,1762.6 OSC455.1
NetOSC455_4: OSC455.4 Rset455a.2 | length 75.1
  4-BOT w20: OSC455.4 Rset455a.2@857.4,1837.4
"NetPorte ET_5": "Porte ET.5" Qir.1 | length 136
  4-BOT w20: Qir.1@465,1505 465,1580 485,1600 517.68,1600
NetQir_3: Qir.3 QirOFF.2 | length 82.6
  4-BOT w25: QirOFF.2 473.74,1378.74 Qir.3@510,1415
NetQirOFF_3: QirOFF.3 QirON.3 Rsave.1 | length 216.5
  4-BOT w25: QirOFF.3 650,1310 675,1335 645,1365 Rsave.1@645,1420
NetQRF_3: QRF.3 RC1240.22
  other v1: 1945,720
NetRledIR_2: RledIR.2 Rsave.2 | length 115.2
  4-BOT w50: Rsave.2 747.09,1407.91 RledIR.2@820,1335
NetRset33a_1: Rset33a.1 Rset33b.2 | length 97.9
  4-BOT w25: Rset33b.2 Rset33a.1@1167.09,1597.91
NetRset33b_1: Rset33b.1 Rset33c.2 | length 67.9
  4-BOT w25: Rset33c.2 Rset33b.1@1045,1500
NetRset455a_1: Rset455a.1 Rset455b.2 | length 92.9
  4-BOT w50: Rset455a.1 Rset455b.2 Rset455b.2@977.09,1942.91
NetRset455b_1: Rset455b.1 Rset455c.2 | length 77.9
  4-BOT w50: Rset455c.2@785,1940 Rset455c.2 Rset455b.1
NetRset455c_1: Rset455c.1 Rset455d.2 | length 82.4
  4-BOT w50: Rset455d.2 647.09,1927.09 Rset455c.1@665,1945
NetRsynchro_1: Rsynchro.1 SYNCHRO.1 | length 199.5
  4-BOT w25: Rsynchro.1@1675,105 1825,105 SYNCHRO.1
PAN2: Upic.18
PAN3: Upic.17
PAN4_QEA: Codeur.2 Upic.16 | length 2258.7
  2-Signal w25: Codeur.2@480,2235 555,2310 700,2310 ; 610,2310 700,2310 ; v1(1145,935) 1345,1135 1345,1825 925,2245 765,2245 700,2310
  3-GND w25: v1(1145,935) v1@1145,945
  4-BOT w16: Upic.16 1116.85,963.15 v1(1145,935)
PAN5_QEB: Codeur.3 Upic.15 | length 1953.8
  2-Signal w25: Codeur.3 580,2180 635,2125 985,2125 1305,1805 1305,1180 v1@1065,940
  4-BOT w16: v1@1075,940 1091.26,956.26 Upic.15
  other v1: 1070,940
PAN8: Upic.27
PAN9: Upic.28
PAN10: Upic.29
PAN11: Upic.30
PAN12: Upic.33
PAN13: Upic.34
PAN14: Upic.35
PAN15: Upic.36
PBT1: Cbt1.2 Rbt1.1 Upic.13 | length 1105.1
  4-BOT w16: Upic.13 1040.08,1055.08 1055,1070 1085,1070 1115,1100 Cbt1.2@1115,1140
  4-BOT w20: Rbt1.1@1105,1915 1125,1895 1125,1750 1295,1580 1295,1290 1150,1145 Cbt1.2@1130,1145
PGC: ICSP.5 Upic.19 | length 977.1
  4-BOT w16: Upic.19 1193.62,1058.62 1300,1165 2045,1165 ICSP.5
PGD: ICSP.4 Upic.20 | length 898.8
  4-BOT w16: Upic.20 1219.21,1039.21 1270,1090 ICSP.4
PIR_OFF: QirOFF.1 Rqoff.1 Upic.2 | length 446.3
  4-BOT w16: 555,1155 625,1085 745,1085 758.58,1071.42 Upic.2
  4-BOT w25: QirOFF.1@475,1275 475,1242.09 557.09,1160
PIR_ON: QirON.1 Rqon.2 Upic.3 | length 237.9
  4-BOT w16: Rqon.2@770,1150 784.17,1135.83 Upic.3
  4-BOT w25: QirON.1 755,1206.14 Rqon.2@755,1165
PRA14_INT3: Upic.52
PRA15_INT4: Upic.53
PRD0: Upic.58
PRE9_INT2: Upic.14
PU2TX: RC1240.6 Upic.40 | length 712.7
  4-BOT w16: Upic.40 1317.01,467.99 1610,175 1770,175 1815,220 v1(1850,220)
PWM1H: Upic.77
PWM1L: Upic.76
PWM2H: Umot.4 Upic.79 | length 627
  4-BOT w16: Umot.4@95,815 208.62,928.62 Upic.79
RE2: Umot.5 Upic.78 | length 401.4
  4-BOT w16: Umot.5@310,815 398.03,903.03 Upic.78
RG2_SCL: Upic.47
RG3_SDA: Upic.46
RG6_SCK2: Upic.6
RG7_SDI2: Upic.7
RG8_SDO2: Upic.8
RG9_SS2: Upic.10
STR_RF_CONFIG: RC1240.4 Upic.38 | length 822.1
  4-BOT w16: Upic.38 1670.83,519.17 1855,335 1855,305 1775,225 v1@1750,225
  other v1: 1745,220
STR_RF_RESET: QRF.1 RpRF.1 Upic.37 | length 613.4
  4-BOT w16: Upic.37 1619.76,544.76 1730,655 QRF.1@1845,655
U1RX: Ru1rx.1 UART1.2 Upic.42 | length 246.2
  4-BOT w16: Upic.42 1193.62,366.38 1200,360 1245,360 UART1.2@1290,315
  4-BOT w25: Ru1rx.1@1300,225 UART1.2
U1TX: Ru1tx.1 UART1.3 Upic.41 | length 316.3
  4-BOT w16: Upic.41 1219.21,385.79 1220,385 1325,385 UART1.3
  4-BOT w25: Ru1tx.1@1400,230 UART1.3
U2RX: RC1240.5 Upic.39 | length 591.7
  4-BOT w16: Upic.39 1616.42,493.58 v1@1795,315
  other v1: 1800,315
VCC: ALIM.2 Cin2.2 Cin.2 Cmot.2 Umot.2 Umot.3 Umot.6 Ureg.1 | length 1693.2
  1-TOP w50: v1(40,715) 45,720 45,1430 Ureg.1@105,1490 ; ALIM.2@105,1875 ALIM.2@130,1900
  1-TOP w100: Ureg.1@105,1490 ALIM.2@105,1875
  4-BOT w25: Umot.3@75,765 Umot.3@90,765 ; Umot.2 45,715 35,725 35,750 50,765 Umot.3@90,765 ; Cmot.2 377.91,765 Umot.6 Umot.3 Umot.3@90,765
  other v1: 40,765
VDD: "Porte ET.6" Ccod.2 Cd33.2 Cdpic1.1 Cdpic2.1 Cdpic3.1 Cdpic4.1 Codeur.4 Cout2.2 Cout.2 DIR.1 ICSP.2 OSC3.3.1 OSC3.3.4 RC1240.12 RC1240.13 Rd455.2 RdOR.2 RintPu.1 Rmclr.2 Rpbt1.2 Rqoff.2 Rset33a.2 Ru1rx.2 Ru1tx.2 Upic.12 Upic.24 Upic.25 Upic.32 Upic.48 Upic.71 Ureg.3 | length 9188.1
  1-TOP w50: Cout2.2@124.33,1255 Ureg.3
  2-Signal w50: v1@124.33,1095.67 175,1045 ; v1(525,1720) 525,1665 915,1275 ; v1@565,570 530,605 530,735 830,735 1030,535 v1(1030,475) ; v1@890,2035 915,2010 915,1580 ; 915,1045 DIR.1@1239.53,1369.53 ; 915,1060 915,1275 ; v1@965,1630 915,1580 ; v1@1029.57,471.1 1029.57,355.43 1265,120 ; 1240,870 v1(1680,1310) ; v1(1300,120) v1(1410,120) ; v1@1375,675 955,675 860,770 450,770 175,1045 ; v1@1395,865 1060,865 880,1045 175,1045 ; 915,1275 915,1580
  4-BOT w16: Cdpic2.1@585,740 601.1,723.9 Upic.71 ; Upic.12 1014.49,1074.49 Cdpic3.1@1040,1100 ; Upic.48 v1@1040.08,474.92 ; Upic.32 Cdpic4.1@1372.72,672.72 ; Upic.25 1381.85,851.85 ; Upic.24 v1@1392.56,877.44
  4-BOT w20: RdOR.2@515,1710 480,1675 480,1645 487.6,1637.4 517.68,1637.4 ; OSC3.3.1 807.4,1597.4 860,1650 Cd33.2@860,1655 ; 1381.85,851.85 v1@1395,865 ; v1@1392.56,877.44 v1@1400,870
  4-BOT w25: Cd33.2 991.54,1653.46 ; 977.09,1662.09 Rd455.2 ; 992.5,1652.5 Rset33a.2@1035,1610 ; v1@1400,865 v1(1405,870) ; v1@1422.09,887.09 Rmclr.2
  4-BOT w50: Ccod.2 640,2310 680,2270 Codeur.4@680,2205 ; Codeur.4@680,2195 Codeur.4@680,2205 ; 865,2065 865,2137.91 Rpbt1.2 705,2180 Codeur.4@680,2205
  other v1: 585,565 1380,675 595,745 510,1080 125,1105 1050,1125 125,1155 125,1205 700,1500 970,1630 890,2040
VDD_RC1240: RC1240.2 RC1240.3 RC1240.11 | length 1096.1
  1-TOP w25: 1650,205 RC1240.2 ; 1655,205 1670,205 1700,235 RC1240.3
  2-Signal w25: v1(1700,315) 1700,320 1745,365 v1@1745,1235
  other v1: 1750,1225
pads on no net: "Porte ET.4" Antenne_433.2 BT1.2 BT1.4 ICSP.6 OSC3.3.5 RC1240.0 RC1240.15 RC1240.16 RC1240.17 RC1240.18 RC1240.19 RC1240.20 RC1240.21 RC1240.23 RC1240.24 RC1240.25 RC1240.26 RC1240.27 RC1240.28 RC1240.29 RC1240.30 RledIR.3 SW1.2 SW1.4 Upic.1 Upic.4 Upic.5 Upic.21 Upic.22 Upic.44 Upic.59 Upic.60 Upic.61 Upic.62 Upic.63 Upic.66 Upic.67 Upic.68 Upic.69 Upic.80

## Polygon pours and split planes (outlines as drawn)
GND on 4-BOT "4-GND" (solid, pour order 1000): 20,2340 1405,2340 1405,1375 2340,1375 2340,25 20,25
GND on 3-GND "3-GND" (solid, pour order 1001): 20,2340 1405,2340 1405,1375 2340,1375 2340,25 20,25
GND on 2-Signal "2-GND" (solid, pour order 1002): 20,2340 1405,2340 1405,1375 2340,1375 2340,25 20,25
GND on 1-TOP "1-GND" (solid, pour order 1003): 20,2340 1405,2340 1405,1375 2340,1375 2340,25 20,25

## Keep-outs
Keep-Out Layer:
  the board outline again, w10

## Other copper
4-BOT:
  pour cut-out: 1221.1,378.6 1221.1,1033.6 1251.1,1033.6 1251.1,378.6
  pour cut-out: 706.1,378.6 706.1,1033.6 736.1,1033.6 736.1,378.6
  pour cut-out: 648.6,491.1 1303.6,491.1 1303.6,431.1 648.6,431.1
  pour cut-out: 643.6,986.1 1298.6,986.1 1298.6,956.1 643.6,956.1

## Silkscreen, mask and mechanical layers (free items; w line width, h text height)
Top Overlay:
  circle w10: c1181.1,1377.95 r100.05
  circle w10: c1181.1,1181.1 r20
  text "Codeur" at 650,2350 h40 r180
  text "ROBOT ESEO" at 1365,2245 h120
  text "2014" at 1915,2245 h120
  text "Emetteur" at 1420,2145 h120
  text "A" at 490,2095 h40 r180
  text "B" at 595,2095 h40 r180
  text "-" at 360,2055 h40
  text "+" at 665,2055 h40
  text "Balise" at 1500,2040 h120
  text "ALIM" at 435,1965 h40 r270
  text "+" at 40,1690 h40
  text "10u" at 275,1640 h40
  text "100n" at 270,1545 h40
  text "LED IR" at 1056.1,1261.1 h40 r90
  text "100n" at 250,1210 h40
  text "10u" at 285,1120 h40
  text "int" at 450,555 h40 r270
  text "100n" at 941.1,511.1 h40
  text "MOTEUR" at 45,455 h40
  text "RST" at 2245,320 h40 r90
  text "uart" at 435,290 h40
  text "user" at 290,245 h40
  text "run" at 570,245 h40
  text "Q" at 900,205 h40
  text "UART" at 1475,100 h40
  text "synchro" at 1775,35 h40
  text "GND Rx Tx" at 1145,20 h40
Bottom Overlay:
  text "1uF" at 745,2290 h40
  text "100k" at 935,2235 h40
  text "455kHz" at 525,2005 h40 r90
  text "220k" at 745,2005 h40
  text "Rs" at 961.1,1911.1 h40
  text "100k" at 1160,1890 h40 r270
  text "1k" at 1020,1715 h40 r270
  text "100n" at 476.1,1701.1 h40
  text "600k" at 1191.1,1656.1 h40
  text "AND" at 460,1655 h40 r90
  text "3.33kHz" at 1220,1460 h40 r270
  text "Tune" at 1055,1420 h40
  text "MOSP" at 445,1360 h40 r90
  text "LED IR" at 1290,1270 h40 r270
  text "MOSN" at 745,1220 h40 r270
  text "10k" at 450,1195 h40 r90
  text "100n" at 1085,1170 h40
  text "10k" at 910,1140 h40
  text "100n" at 1185,1110 h40 r270
  text "1uF" at 410,925 h40 r90
  text "BD6220" at 295,865 h40
  text "DSPIC30F" at 846.1,826.1 h40 r135
  text "100n" at 555,810 h40 r90
  text "MOSN" at 1960,785 h40
  text "10k" at 2230,785 h40 r270
  text "10k" at 1680,735 h40 r90
  text "100n" at 1430,625 h40 r270
  text "100k" at 561.1,611.1 h40
  text "100n" at 2133.9,511.1 h40 r180
  text "Moteur" at 75,500 h40 r180
  text "100" at 2010,415 h40 r270
  text "100k" at 458.9,393.9 h40 r180
  text "100n" at 845,330 h40 r180
  text "1k" at 420,245 h40
  text "1k" at 530,245 h40
  text "1k" at 650,240 h40
  text "10k" at 1240,225 h40 r90
  text "100" at 1660,155 h40
  text "10k" at 1455,140 h40 r270
  text "22p" at 805,75 h40 r180
  text "22p" at 950,75 h40 r180
Mechanical 15:
  circle w10: c1181.1,1377.95 r590.55
  circle w10: c1181.1,1181.1 r500
  text "Moteur" at 1645,2600 h60

## Dimensions
157.48,2204.72 to 0,2362.2 on Mechanical 15
0,2362.2 to 1181.1,2204.72 on Mechanical 15
2362.2,0 to 0,0 on Mechanical 15
2362.2,2362.2 to 2362.2,0 on Mechanical 15
0,0 to 157.48,157.48 on Mechanical 15
0,0 to 1131.1,1377.95 on Mechanical 15
1181.1,1377.95 to 2050,2540 on Mechanical 15

## Text inside footprints (layer, text, board x,y; h text height)
RledIR: Bottom Overlay "+" at 1025,670 h60 r90